# Altium PCB AIRZAI_LID_BD_REVC.PcbDoc (part 1 of 2)
Units mm, origin at the board's own origin, x right, y up, seen from the top; angles counter-clockwise.
Board outline 86.34 x 69.25 mm, 4 copper layers (Top, GND, PWR, Bottom), stack 0.78 mm thick; 60 components, 34 nets, 183 pads, 193 vias.
Unrouted connection lines stored in the file: 106.
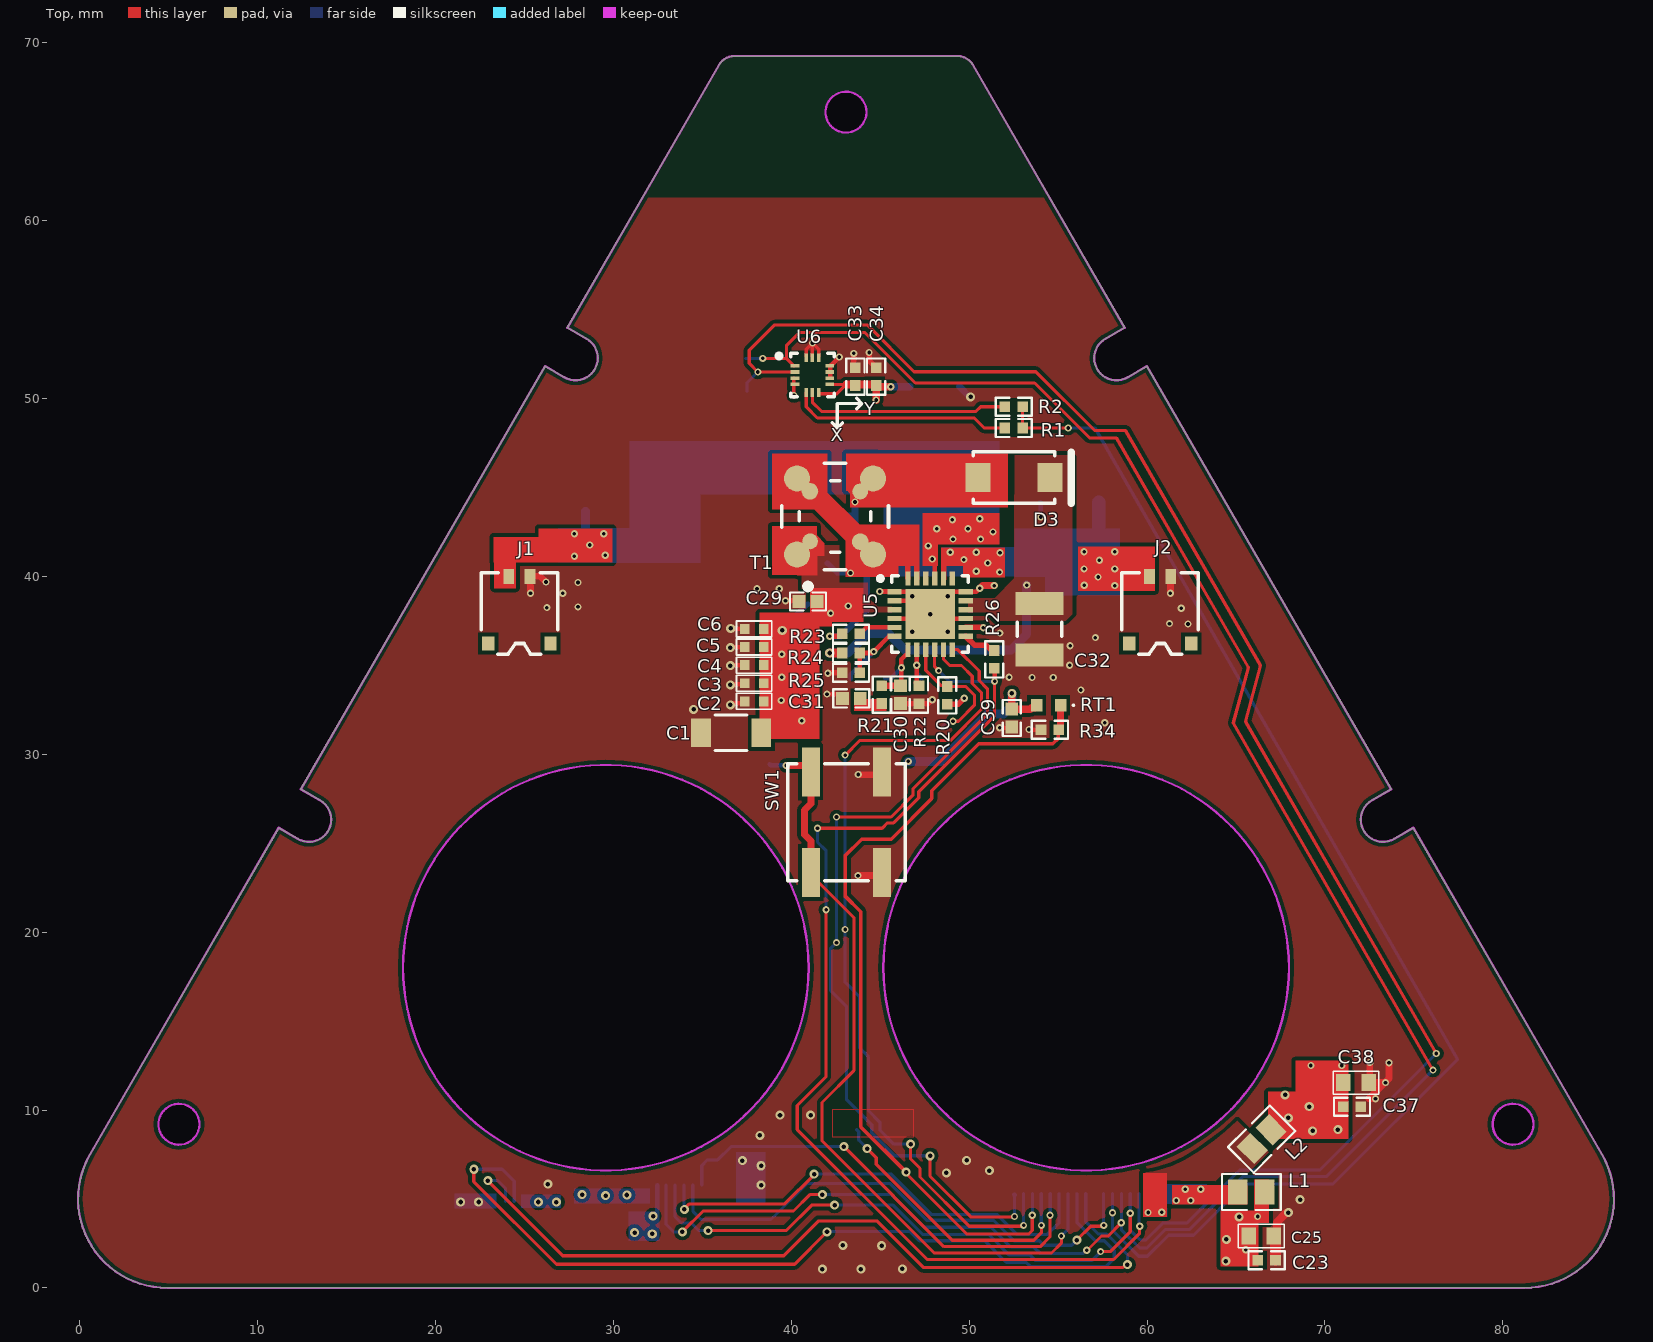
[diagram p0: Top view]
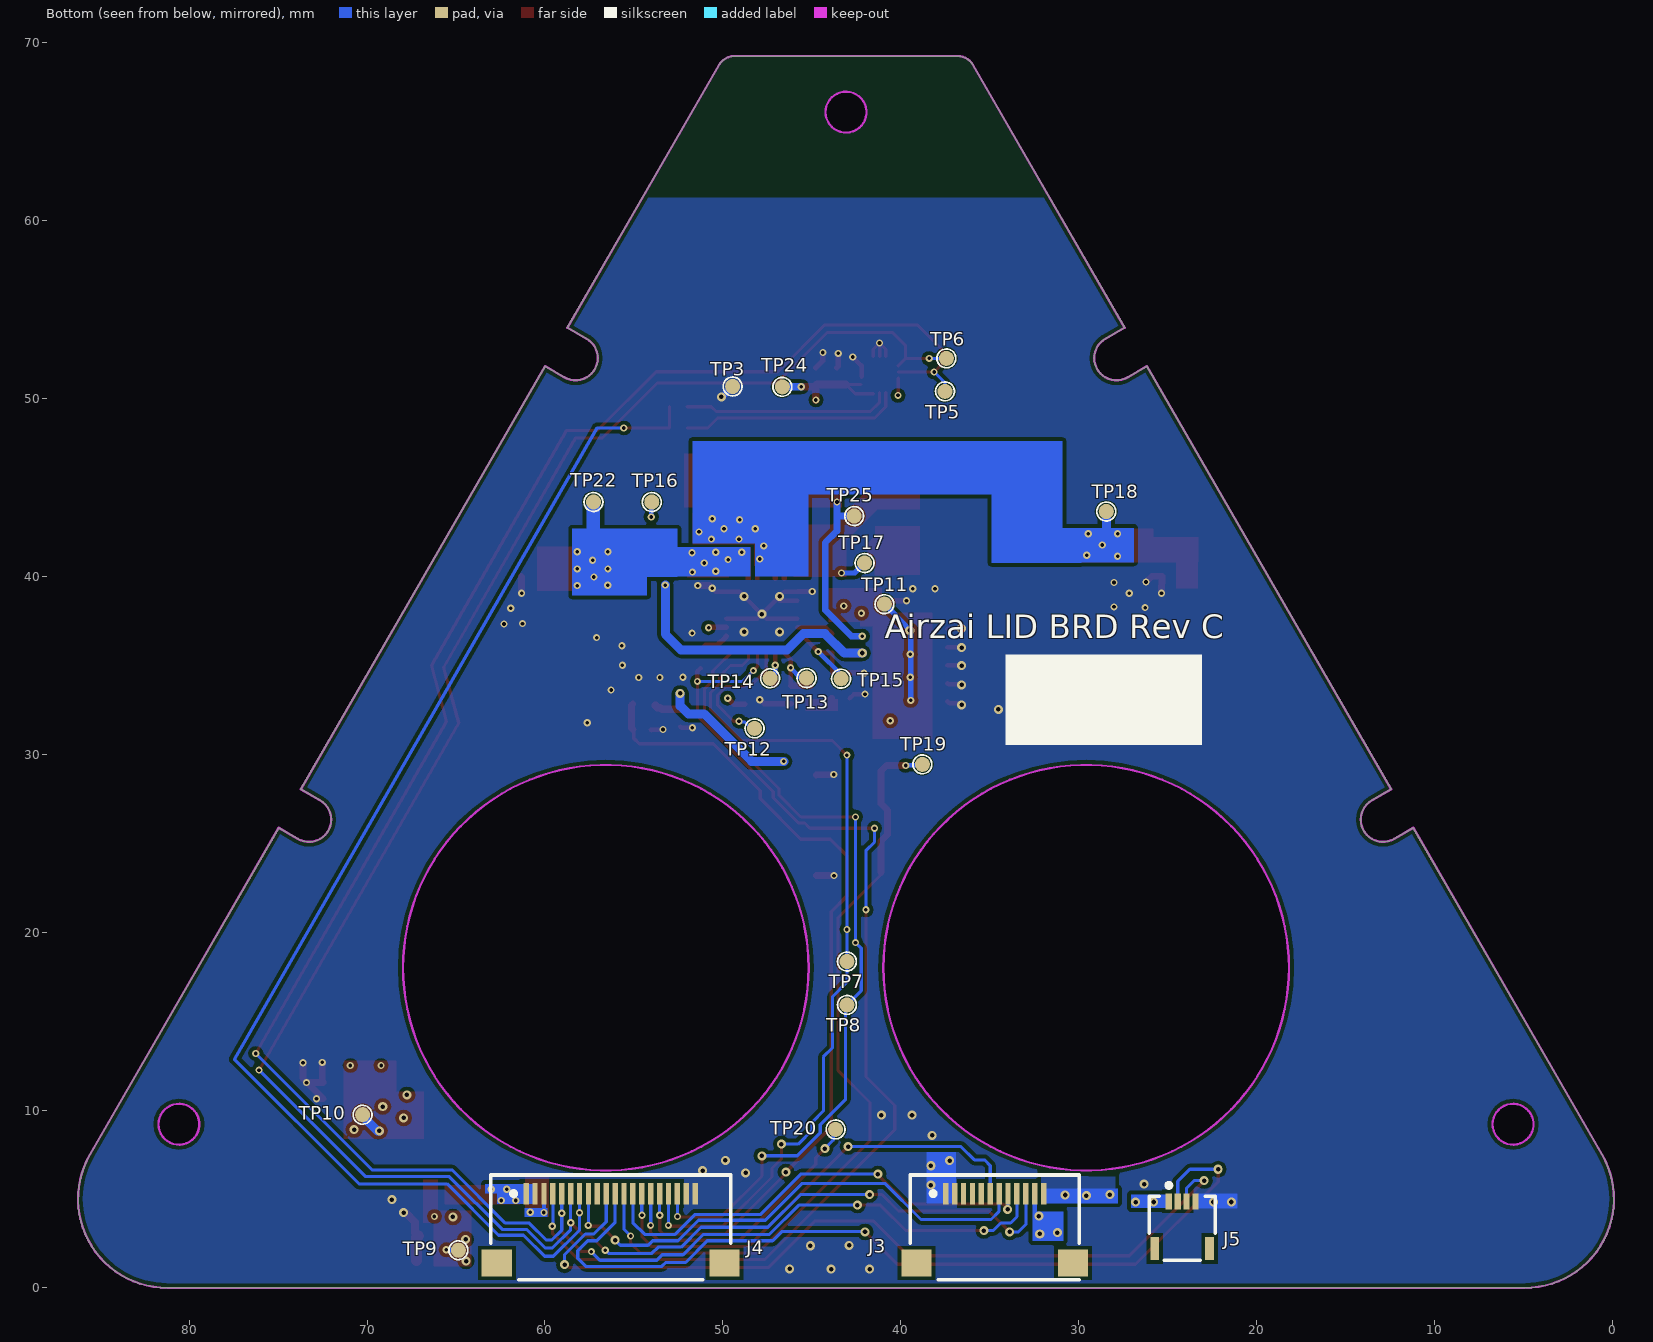
[diagram p1: Bottom view, seen from below]
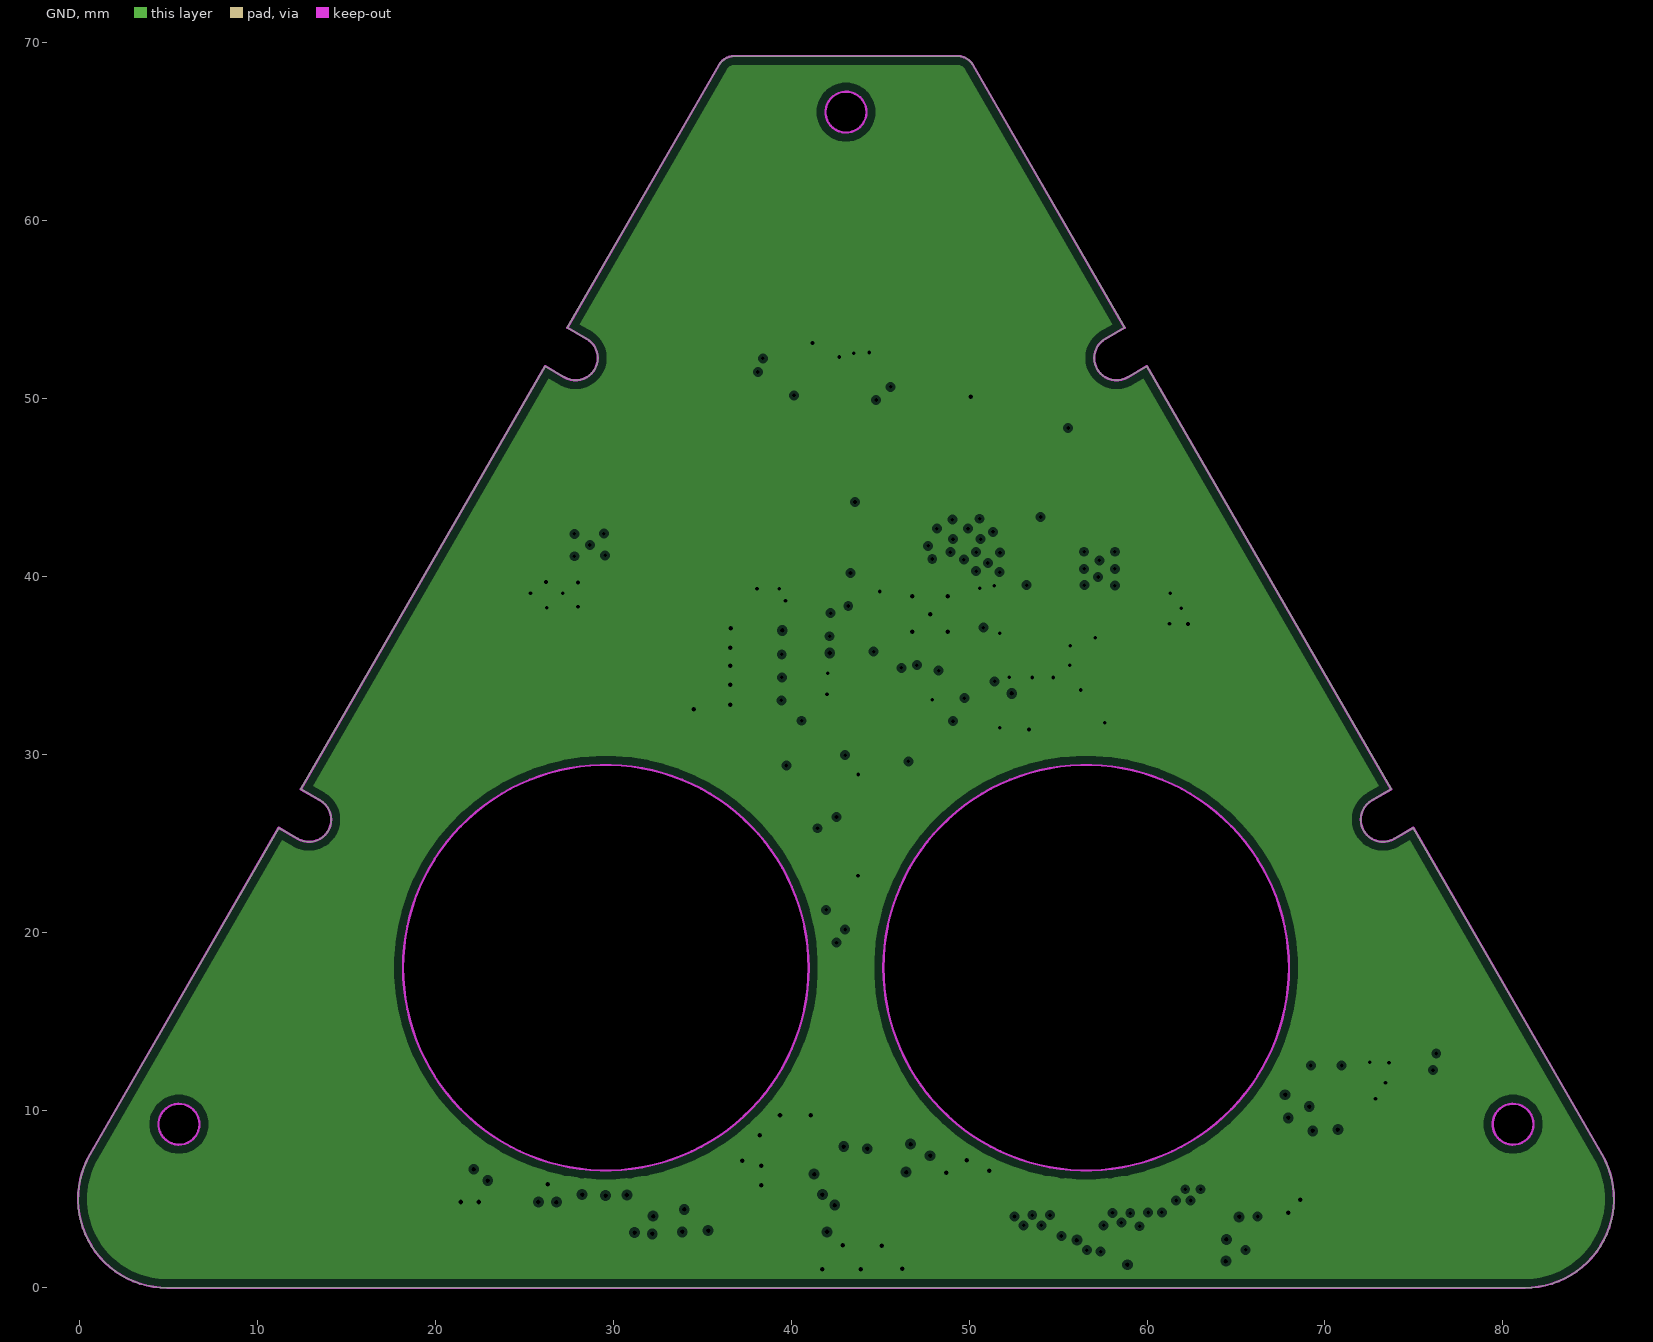
[diagram p2: GND, clearances drawn from the general rule]
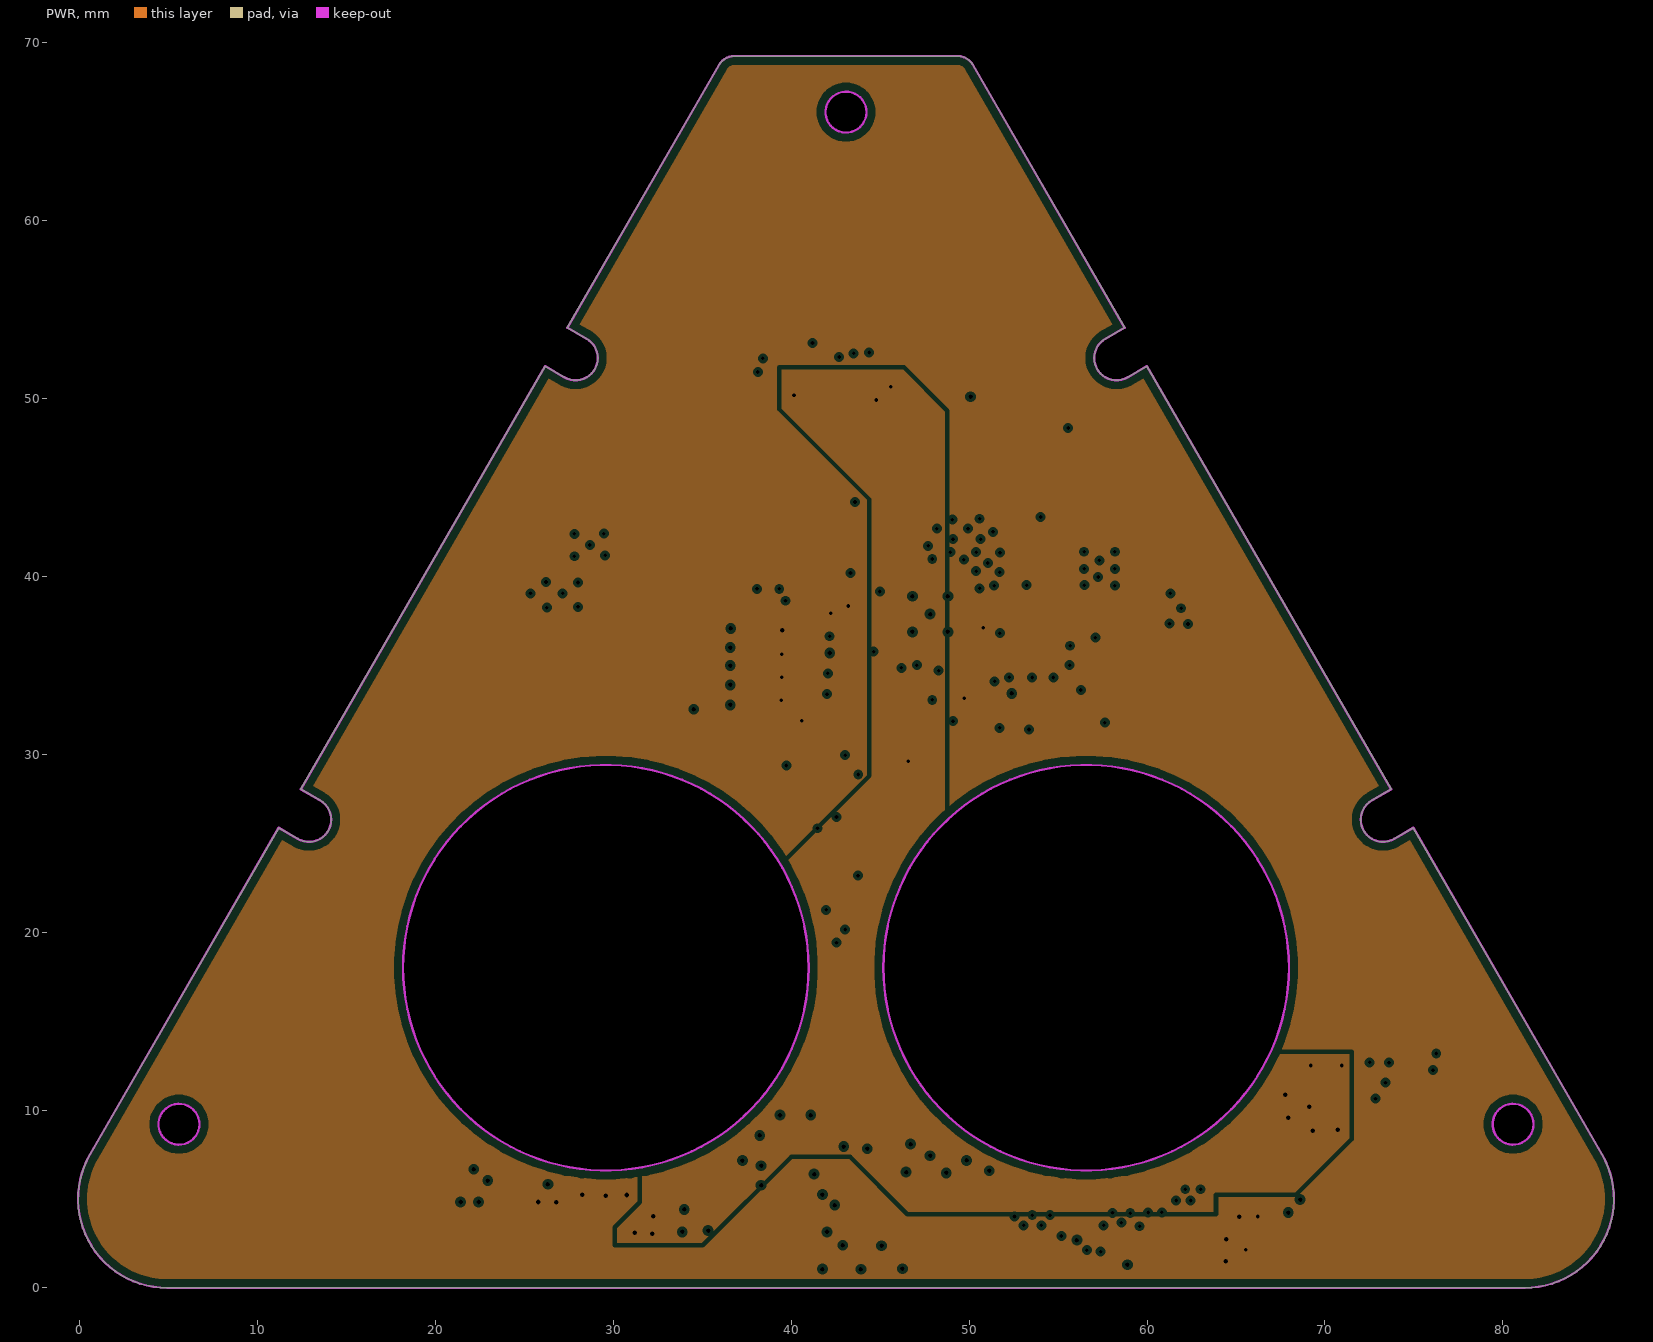
[diagram p3: PWR, clearances drawn from the general rule]
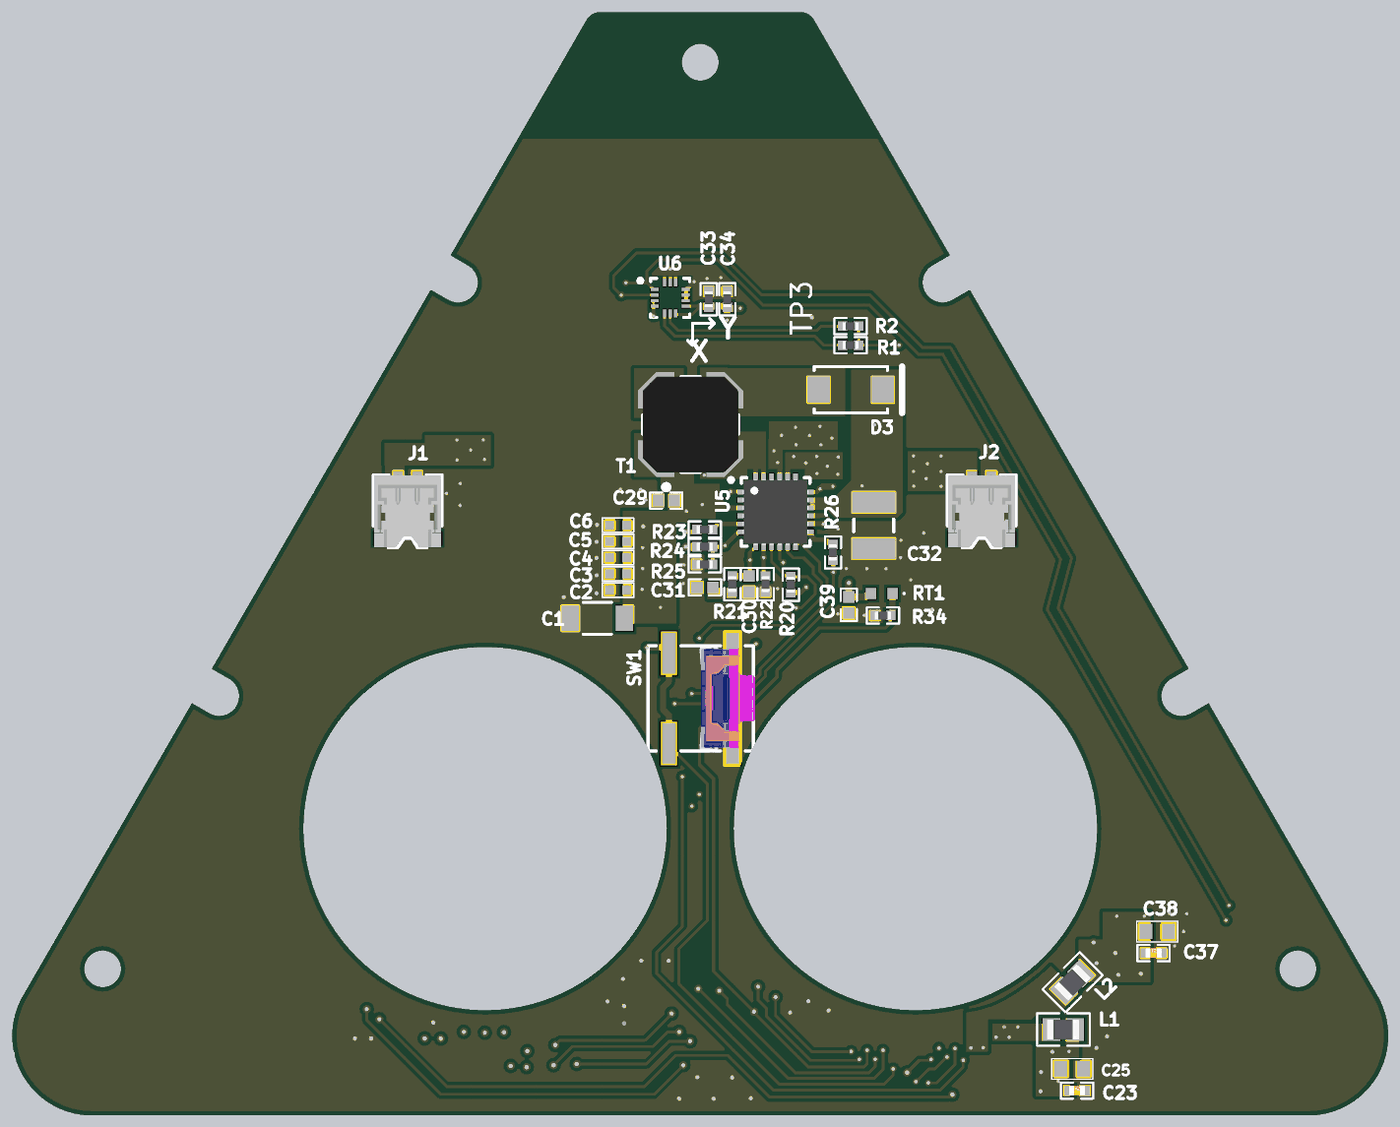
[diagram p5: 3D render of the assembled board from above, using the file's embedded part models]
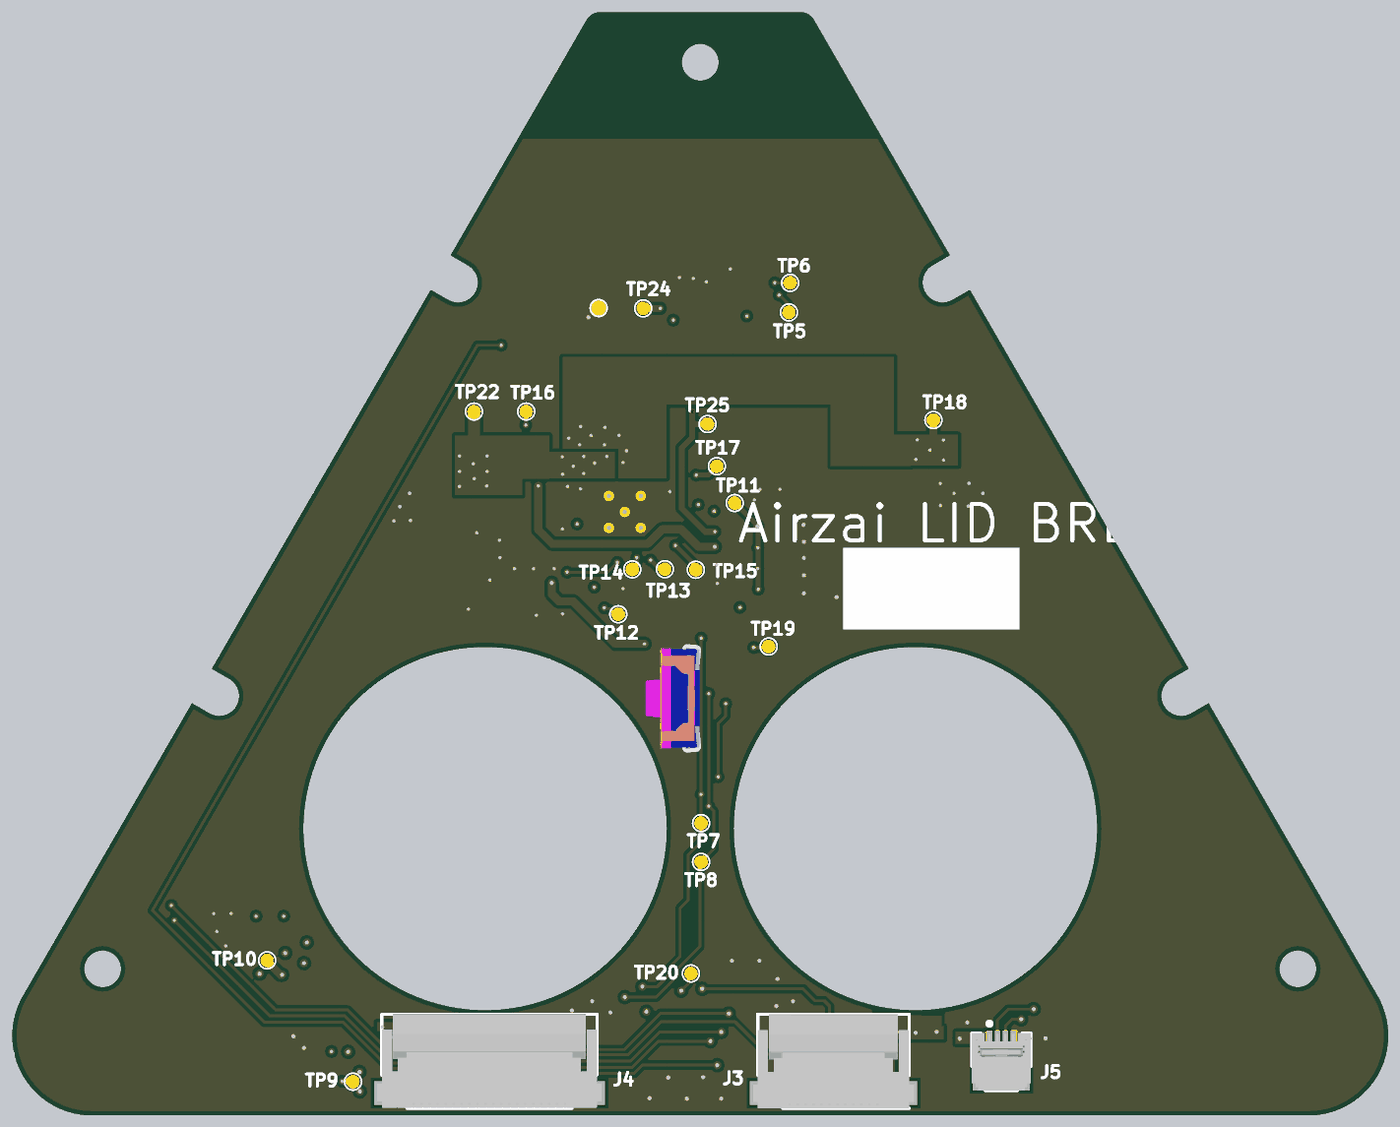
[diagram p6: 3D render of the assembled board from below, using the file's embedded part models]

## Layer stack, top to bottom
Top Solder: solder mask 0.0102, Solder Resist, Dk 3.5
Top: signal copper 0.06
Dielectric1: prepreg 0.132, FR-4, Dk 4.8
GND: plane copper 0.06, net GND
Dielectric 2: core 0.276, Dk 4.2
PWR: plane copper 0.06, net (Multiple Nets)
Dielectric3: prepreg 0.132, FR-4, Dk 4.8
Bottom: signal copper 0.06
Bottom Solder: solder mask 0.0102, Solder Resist, Dk 3.5

## Board outline
4.905,0 cw(c4.905,5) 0.575,7.5 11.179,25.867 12.262,25.242 ccw(c12.887,26.325) 13.512,27.408 12.429,28.033 26.161,51.817 27.244,51.192 ccw(c27.869,52.275) 28.494,53.358 27.411,53.983 35.937,68.75 cw(c36.803,68.25) 36.803,69.25 49.349,69.25 cw(c49.349,68.25) 50.215,68.75 58.741,53.983 57.658,53.358 ccw(c58.283,52.275) 58.908,51.192 59.991,51.817 73.723,28.033 72.64,27.408 ccw(c73.265,26.325) 73.89,25.242 74.973,25.867 85.577,7.5 cw(c81.247,5) 81.247,0
cut-out: 45.176,18 ccw(c56.576,18) 56.576,6.6 ccw(c56.576,18) 67.976,18 ccw(c56.576,18) 56.576,29.4 ccw(c56.576,18)
cut-out: 29.576,6.6 cw(c29.576,18) 18.176,18 cw(c29.576,18) 29.576,29.4 cw(c29.576,18) 40.976,18 cw(c29.576,18)
cut-out: 43.076,64.95 cw(c43.076,66.1) 41.926,66.1 cw(c43.076,66.1) 43.076,67.25 cw(c43.076,66.1) 44.226,66.1 cw(c43.076,66.1)
cut-out: 79.426,9.2 ccw(c80.576,9.2) 80.576,8.05 ccw(c80.576,9.2) 81.726,9.2 ccw(c80.576,9.2) 80.576,10.35 ccw(c80.576,9.2)
cut-out: 5.576,8.05 cw(c5.576,9.2) 4.426,9.2 cw(c5.576,9.2) 5.576,10.35 cw(c5.576,9.2) 6.726,9.2 cw(c5.576,9.2)

## Design rules (kind name [scope] priority, off if disabled: settings)
Clearance Clearance_gnd_polygon [(InNet('GND') AND InPolygon)] p1: gap=0.203 ignorepadtopadclearanceinfootprint=TRUE
Clearance [All] p2: gap=0.152 ignorepadtopadclearanceinfootprint=TRUE
ComponentClearance [All] p1: gap=0.1 collisioncheckmode=3 verticalgap=0.1 showdistances=FALSE
HoleSize HoleSize_1 [All] p1: absolutevalues=TRUE maxlimit=2540 minlimit=0.1 maxpercent=80.000 minpercent=20.000
HoleSize [All] p2: absolutevalues=TRUE maxlimit=2.54 minlimit=0.025 maxpercent=80.000 minpercent=20.000
HoleToHoleClearance mdViaViaSameLayer [All] p1: gap=0.2 allowstackedmicrovias=TRUE
HoleToHoleClearance [All] p2: gap=0.254 allowstackedmicrovias=TRUE
MinimumSolderMaskSliver [All] p1: minsoldermaskwidth=0
PasteMaskExpansion mlMinCreamFrame [All] p1: expansion=0
PasteMaskExpansion [All] p2: expansion=0
PlaneClearance [All] p1: clearance=0.178
PlaneConnect [All] p1: planeconnectstyle=Relief reliefexpansion=0.203 reliefentries=4 reliefconductorwidth=0.254 reliefairgap=0.178
PolygonConnect ThermalVias [IsVia] p1: connectstyle=Direct reliefconductorwidth=0.254 reliefentries=4 polygonreliefangle="90 Angle" airgapwidth=0.254
PolygonConnect [All] p2: connectstyle=Direct reliefconductorwidth=0.254 reliefentries=4 polygonreliefangle="90 Angle" airgapwidth=0.254
RoomDefinition "AIRZAI_LID_BD_REVC Sheet1" [InComponentClass('AIRZAI_LID_BD_REVC Sheet1')] p1: confinementstyle=ConfineIn formatcopy=TRUE lockcomponents=FALSE outline -2.613,-6.673 385.794,-6.673 385.794,80.227 -2.613,80.227
RoutingVias [All] p1: holewidth=0.3 width=0.6 viastyle="Through Hole" minholewidth=0.15 minwidth=0.3 maxholewidth=0.3 maxwidth=0.6
SilkToSilkClearance [All] p1 off: silktosilkclearance=0
SilkToSolderMaskClearance [IsPad] p1 off: minsilkscreentomaskgap=0.254 clearancetoexposedcopper=TRUE
SolderMaskExpansion mlMinStopFrame [All] p1: expansion=0.07
SolderMaskExpansion [All] p2: expansion=0.07
UnRoutedNet [All] p1: checkbadconnections=TRUE
Width [All] p1: maxlimit=25.4 minlimit=0.178 preferedwidth=0.178
20 further rules are at their usual default settings.

## Components (designator, comment, footprint, x,y, rotation, side; value= is the part's Value field where it differs from the comment)
C1 "GRM31CR60J107ME39L" 1206_180 36.623,31.199 r180 top value=100uF
C2 "C1005X5R0J475M050BC" SM0402_BTD.1SM_ACT_H55_CAP_WSS 38.451,32.977 r180 top value=4.7uF
C3 "C1005X5R0J475M050BC" SM0402_BTD.1SM_ACT_H55_CAP_WSS 38.451,33.993 r180 top value=4.7uF
C4 "C1005X5R0J475M050BC" SM0402_BTD.1SM_ACT_H55_CAP_WSS 38.451,35.009 r180 top value=4.7uF
C5 "C1005X5R1A104K050BA" SM0402_BTD.1SM_ACT_H55_CAP_WSS 38.451,36.025 r180 top value=0.1uF
C6 "C1005X5R1A104K050BA" SM0402_BTD.1SM_ACT_H55_CAP_WSS 38.451,37.041 r180 top value=0.1uF
C23 "0.1µF" 0402CAP 66.722,1.557 r0 top
C25 "10µF" SM0603_BTD.1SM_H90_WSS 65.706,2.92 r0 top
C29 "1uF 6.3V" CAPC0402(1005)60_M 40.941,38.59 r0 top value=1uF
C30 "C390pF" CAPC0402(1005)60_M 46.141,33.349 r270 top value=390pF
C31 "C3.9nF" CAPC0402(1005)60_M 43.373,33.141 r0 top value=3.9nF
C32 "2.2uF" C1210_N 53.965,37.027 r90 top value=2.2µF
C33 "0.1µF" 0402 43.601,51.226 r90 top
C34 "2.2µF" 0402 44.77,51.226 r270 top
C37 "0.1µF" 0402CAP 71.522,10.186 r0 top
C38 "10µF" SM0603_BTD.1SM_H90_WSS 71.04,11.539 r0 top
C39 "CAP 100nF 10V 0402(1005)" CAPC0402(1005)60_M 52.396,32.037 r90 top value=100nF
D3 "STPS2H100A" STM-SMA-2_V 52.523,45.55 r0 top value="100V 2A"
J1 "=Value" CON_78171_0002 24.112,40.002 r0 top locked
J2 "=Value" CON_78171_0002 60.137,40.002 r0 top
J3 "XF2M-1215-1A-R100" Omron_XF2M-1215-1A-R100 34.718,3.397 r180 bottom locked
J4 "XF2M-2015-1A-R100" OMRON_XF2M-2015-1A_0 56.305,3.398 r180 bottom
J5 "503480-0400" MOLX-503480-0400 24.177,3.538 r180 bottom
L1 "CB2012T100KR" 0805 65.861,5.392 r0 top value=10uH
L2 "CB2012T100KR" 0805 66.442,8.364 r45 top value=10uH
R1 "DNP" 0402 52.506,48.344 r180 top
R2 "ERJ-2GE0R00X" 0402 52.506,49.538 r180 top value=0
R20 "51K1 1% 0402(1005)" 0402 48.764,33.307 r270 top value="51100.00 Ohm"
R21 "47K 1%" 0402 45.087,33.349 r270 top value="47000.00 Ohm"
R22 "12K 5%" 0402 47.175,33.344 r90 top value="12000.00 Ohm"
R23 "20K5" 0402 43.356,36.773 r180 top value="20500.00 Ohm"
R24 "560K" 0402 43.356,35.692 r180 top value="560000.00 Ohm"
R25 "10K" 0402 43.356,34.58 r0 top value="10000.00 Ohm"
R26 "0R" 0402 51.405,35.335 r270 top
R34 "10K 1% 0402(1005)" 0402 54.538,31.377 r0 top value="10000.00 Ohm"
RT1 "NCP18XH103F03RB" MURA-NCP18XH103F03RB-2_V 54.465,32.757 r180 top value=3455K
SW1 "SKRAALE010" SW_ALPS_SKRAALE010 43.107,26.175 r90 top locked
T1 "NA5880-AE" COILCRAFT_NA5880-AE_MFG 42.464,43.368 r90 top value=3.3uH
TP3 "TESTPOINT" TP_0.9MM 49.45,50.676 r270 bottom
TP5 "TESTPOINT" TP_0.9MM 37.512,50.401 r270 bottom
TP6 "TESTPOINT" TP_0.9MM 37.435,52.255 r270 bottom
TP7 "TESTPOINT" TP_0.9MM 43.023,18.346 r90 bottom
TP8 "TESTPOINT" TP_0.9MM 43.023,15.908 r90 bottom
TP9 "TESTPOINT" TP_0.9MM 64.867,2.116 r90 bottom
TP10 "TESTPOINT" TP_0.9MM 70.252,9.734 r90 bottom
TP11 "TESTPOINT" TP_0.9MM 40.915,38.438 r90 bottom
TP12 "TESTPOINT" TP_0.9MM 48.218,31.453 r90 bottom
TP13 "TESTPOINT" TP_0.9MM 45.293,34.28 r90 bottom
TP14 "TESTPOINT" TP_0.9MM 47.341,34.272 r90 bottom
TP15 "TESTPOINT" TP_0.9MM 43.354,34.247 r90 bottom
TP16 "TESTPOINT" TP_0.9MM 53.996,44.178 r90 bottom
TP17 "TESTPOINT" TP_0.9MM 42.033,40.749 r90 bottom
TP18 "TESTPOINT" TP_0.9MM 28.444,43.645 r90 bottom
TP19 "TESTPOINT" TP_0.9MM 38.782,29.433 r90 bottom
TP20 "TESTPOINT" TP_0.9MM 43.662,8.908 r90 bottom
TP22 "TESTPOINT" TP_0.9MM 57.273,44.178 r90 bottom
TP24 "TESTPOINT" TP_0.9MM 46.656,50.655 r90 bottom
TP25 "TESTPOINT" TP_0.9MM 42.617,43.391 r90 bottom
U5 "FAN8841MPXCT-ND" WFQFN-24-FAN8841MPX 47.807,37.879 r0 top value=FAN8841MPX
U6 "LIS2DHTR" STM-LGA-14_L 41.188,51.316 r0 top

## Footprints (in the part's own frame and the unit in brackets; to place one, negate y for a bottom-side part, rotate by r counter-clockwise, add the part's x,y. Pads: shape width x height; smd on the part's side, far side on the other; paste and mask are expansions set on the pad)
0402 [mm] "Chip Resistor, Body 1.1x0.5mm, IPC High Density"
  rect 0.6x0.6 smd: 1(-0.5,0) 2(0.5,0)
  silkscreen extent -1.02,-0.51 1.02,0.51, body extent -0.5,-0.25 0.5,0.25, height 0.27
0402CAP [mm] "Chip Capacitor, Body 1.1x0.5mm, IPC High Density"
  rect 0.6x0.6 smd: 1(-0.5,0) 2(0.5,0)
  silkscreen extent -1.02,-0.51 1.02,0.51, body extent -0.5,-0.3 0.5,0.3, height 0.19
0805 [mm] "Chip Resistor, Body 2.0x1.3mm, IPC High Density"
  rect 1.1x1.4 smd: 1(-0.75,0) 2(0.75,0)
  silkscreen extent -1.65,-1.02 1.65,1.02, body extent -1.02,-0.64 0.98,0.62, height 0.47
1206_180 [mm]
  rect 1.1x1.6 smd: 1(-1.7,0) 2(1.7,0)
  silkscreen extent -0.9,-1 0.9,1, body extent -1.75,-0.95 1.75,0.95, height 1.8
C1210_N [mm] "Chip Capacitor, Body 3.2x2.5mm, IPC Medium Density"
  rect 1.3x2.7 smd: 1(-1.45,0) 2(1.45,0)
  silkscreen extent -0.4,-1.25 0.4,1.25, body extent -1.7,-1.35 1.7,1.35, height 1.5
CAPC0402(1005)60_M [mm] "Chip Capacitor, Body 1.0x0.5mm, Height 0.6mm, IPC Low Density"
  rect 0.72x0.72 smd: 1(-0.5,0) 2(0.5,0)
  silkscreen extent -1.02,-0.51 1.02,0.51, body extent -0.55,-0.3 0.55,0.3, height 0.6
COILCRAFT_NA5880-AE_MFG [mm]
  round 1.463 smd paste-1000 mask-1000: 1(-2.138,2.138) 2(-2.138,-2.138) 3(2.138,-2.138) 4(2.138,2.138)
  round 0.889 smd paste+0 mask+0: 1(-1.4,1.407) 3(1.4,-1.407)
  round 0.935 smd paste+0 mask+0: 2(-1.414,-1.413) 4(1.414,1.413)
  Top region: -1,3.3 -2.125,3.3 -3.3,2.125 -3.3,1 -2.1,1 -1,2.1
  Top region: 1,3.3 2.125,3.3 3.3,2.125 3.3,1 2.1,1 1,2.1
  Top region: -1,-3.3 -2.125,-3.3 -3.3,-2.125 -3.3,-1 -2.1,-1 -1,-2.1
  Top region: 1,-3.3 2.125,-3.3 3.3,-2.125 3.3,-1 2.1,-1 1,-2.1
  Top region: 0.625,2.2 1.305,2.2 2.2,1.42 2.2,0.625 1.52,0.625 0.625,1.42 0.625,2.2
  Top region: 2.2,-0.625 2.2,-1.305 1.305,-2.2 0.625,-2.2 0.625,-1.42 1.52,-0.625 2.2,-0.625
  Top region: -0.625,-2.2 -1.305,-2.2 -2.2,-1.42 -2.2,-0.625 -1.52,-0.625 -0.625,-1.42 -0.625,-2.2
  Top region: -2.2,0.625 -2.2,1.305 -1.305,2.2 -0.625,2.2 -0.625,1.42 -1.52,0.625 -2.2,0.625
  silkscreen extent -4.06,-3 3,3, body extent -3.4,-3.4 3.4,3.4, height 0.25
CON_78171_0002 [mm] "1.55 MATED HT"
  rect 0.7x0.8 smd mask+0.1: 0(-1.15,-3.775) 0(2.35,-3.775)
  rect 0.6x0.85 smd mask+0.1: 1(0,0) 2(1.2,0)
  silkscreen extent -1.55,-4.37 2.75,0.2, body extent -1.5,-4.33 2.7,0.2, height 1.44
MOLX-503480-0400 [mm] "FPC Connector, 4-Leads, Right Angle, Pitch 0.5 mm, Mated Height 1.0 mm, SMT"
  rect 0.35x0.9 smd: 1(-0.75,1.325) 2(-0.25,1.325) 3(0.25,1.325) 4(0.75,1.325)
  rect 0.5x1.3 smd: MP1(-1.54,-1.325) MP2(1.54,-1.325)
  silkscreen extent -1.85,-1.98 1.85,2.35, body extent -1.85,-1.97 1.85,1.63, height 1.91
MURA-NCP18XH103F03RB-2_V [mm] "Chip, 2-Leads, Body 1.6x0.8mm"
  rect 0.65x0.7 smd: 1(-0.675,0) 2(0.675,0)
  silkscreen extent -1.45,-0.05 -1.35,0.05, body extent -0.8,-0.4 0.8,0.4, height 0.8
Omron_XF2M-1215-1A-R100 [mm]
  rect 0.3x1.2 smd paste+0: 1(-2.75,1.9) 2(-2.25,1.9) 3(-1.75,1.9) 4(-1.25,1.9) 5(-0.75,1.9) 6(-0.25,1.9) 7(0.25,1.9) 8(0.75,1.9) 9(1.25,1.9) 10(1.75,1.9) 11(2.25,1.9) 12(2.75,1.9)
  rect 1.7x1.5 smd paste+0: MP1(-4.4,-2) MP2(4.4,-2)
  silkscreen extent -4.75,-2.95 4.75,2.95, body extent -5.05,-2.95 5.05,2.95, height 2
OMRON_XF2M-2015-1A_0 [mm]
  rect 0.3x1.2 smd paste+0: 1(-4.75,1.9) 2(-4.25,1.9) 3(-3.75,1.9) 4(-3.25,1.9) 5(-2.75,1.9) 6(-2.25,1.9) 7(-1.75,1.9) 8(-1.25,1.9) 9(-0.75,1.9) 10(-0.25,1.9) 11(0.25,1.9) 12(0.75,1.9) 13(1.25,1.9) 14(1.75,1.9) 15(2.25,1.9) 16(2.75,1.9) 17(3.25,1.9) 18(3.75,1.9) 19(4.25,1.9) 20(4.75,1.9)
  rect 1.7x1.5 smd paste+0: MP1(-6.4,-2) MP2(6.4,-2)
  silkscreen extent -6.75,-2.95 6.75,2.95, body extent -7.05,-2.92 7.05,2.98, height 2
SM0402_BTD.1SM_ACT_H55_CAP_WSS [mil]
  rect 22x22 smd mask+4: 1(0,0) 2(42,0)
  silkscreen extent -18,-18 60,18, body extent -1,-10 44,10, height 26
SM0603_BTD.1SM_H90_WSS [mil]
  rect 32x38 smd mask+4: 1(0,0) 2(56,0)
  silkscreen extent -23,-26 79,26, body extent -4,-17 59,17, height 35
STM-LGA-14_L [mm] "LGA, 14-Leads, Body 2.15x2.15mm, Pitch 0.35mm, IPC High Density"
  rect 0.5x0.2 smd mask+0.07: 1(-0.974,0.525) 2(-0.974,0.175) 3(-0.974,-0.175) 4(-0.974,-0.525) 8(0.974,-0.525) 9(0.974,-0.175) 10(0.974,0.175) 11(0.974,0.525)
  rect 0.2x0.5 smd mask+0.07: 5(-0.35,-0.974) 6(0,-0.974) 7(0.35,-0.974) 12(0.35,0.974) 13(0,0.974) 14(-0.35,0.974)
  silkscreen extent -2,-1.22 1.22,1.23, body extent -1.08,-1.07 1.07,1.08, height 1
STM-SMA-2_V [mm] "Diode, 2-Leads, Body 4.6x2.9mm"
  rect 1.4x1.64 smd: 1(-2.015,0) 2(2.015,0)
  silkscreen extent -2.3,-1.45 3.21,1.45, body extent -2.3,-1.45 2.3,1.45, height 2.71
SW_ALPS_SKRAALE010 [mm] "6.2MM SQ 2.9RD ACT"
  rect 2.75x1 smd paste-0.1 mask+0.102: 1(-2.825,2) 1(2.825,2) 2(-2.825,-2) 2(2.825,-2)
  silkscreen extent -3.3,-3.3 3.3,3.3, body extent -3.4,-3.21 3.4,3.22, height 3.48
TP_0.9MM [mm] "0.9MM DIA TESTPOINT"
  round 0.85 smd paste-5 mask+0.05: 1(0,0)
  silkscreen extent -0.53,-0.53 0.53,0.53
WFQFN-24-FAN8841MPX [mm]
  rect 0.8x0.3 smd mask+0.07: 1(-2,1.25) 2(-2,0.75) 3(-2,0.25) 4(-2,-0.25) 5(-2,-0.75) 6(-2,-1.25) 13(2,-1.25) 14(2,-0.75) 15(2,-0.25) 16(2,0.25) 17(2,0.75) 18(2,1.25)
  rect 0.3x0.8 smd mask+0.07: 7(-1.25,-2) 8(-0.75,-2) 9(-0.25,-2) 10(0.25,-2) 11(0.75,-2) 12(1.25,-2) 19(1.25,2) 20(0.75,2) 21(0.25,2) 22(-0.25,2) 23(-0.75,2) 24(-1.25,2)
  rect 2.8x2.8 smd: 25(0,0)
  silkscreen extent -2.92,-2.15 2.15,2.15, body extent -2.05,-2.05 2.05,2.05, height 0.8

## Part data
C1: "CAP, CERM, 100 µF, 6.3 V, +/- 20%, X5R, 1206", Cap_Case=1206, Manufacturer=MuRata, Supplier Part Number 1=490-4539-1-ND, TempCo=X5R, Tolerance_%=20, Value1="0.003 ohm", Value2=6.3V, ValueDisplayed=100µF, AEC Category=Q200, AEC Qualified=?, Cap_F=0.0001, ComponentLink1Description="Datasheet link", ComponentLink1URL=http://search.murata.co.jp/Ceramy/PnsearchViewAction.do?HnOFG=ON&HnNFG=ON&SEL_CNT=50&sLang=en&sKey=GRM31CR60J107ME39L&x=9&y=9&search=startwith, CompType=Capacitor, ESR_ohm=0.003, LatestRevisionDate=2016-07-02, MountType=SMT, PackageReference=1206, PartNumber=GRM31CR60J107ME39L, Polarized=N, Published=2008-06-19, Publisher="Texas Instruments", RoHS=Y, SizeArea_mm2=5.12, SizeAreaWB_mm2=10.92, SizeX_mm=3.2, SizeY_mm=1.6, SizeZ_mm=1.8, Supplier 1=Digi-Key, Supplier 2=Mouser, Supplier 3=Farnell, Supplier Part Number 2=81-GRM31CR60J107ME9L, Supplier Part Number 3=1735535, SymbolVersion=2008-07-09, TaMax_C=85, TaMin_C=-55, Technology=Ceramic, U/M=EA, VDC_V=6.3
C2: "CAP, CERM, 4.7 µF, 6.3 V, +/- 20%, X5R, 0402", Manufacturer=TDK, PartNumber=C1005X5R0J475M050BC
C3 C4: "CAP, CERM, 4.7 µF, 6.3 V, +/- 20%, X5R, 0402", Cap_Case=0402, Manufacturer=TDK, Supplier Part Number 1=445-7395-1-ND, TempCo=X5R, Tolerance_%=20, Value1=Unknown, Value2=6.3V, ValueDisplayed=4.7µF, Cap_F=0.0000047, ComponentLink1Description="Datasheet link", ComponentLink1URL=http://www.tdk.com/pdf/TDKMLCCCapRange.pdf, CompType=Capacitor, LatestRevisionDate=2015-02-23, MountType=SMT, PackageReference=0402, PartNumber=C1005X5R0J475M050BC, Polarized=N, Published=2008-06-19, Publisher="Texas Instruments", RoHS=Y, Supplier 1=Digi-Key, Supplier 2=Farnell, Supplier 3=Newark, Supplier Part Number 2=1962109, Supplier Part Number 3=48T2906, SymbolVersion=2008-07-09, TaMax_C=85, TaMin_C=-55, Technology=Ceramic, U/M=EA, VDC_V=6.3
C5: "CAP, CERM, 0.1 µF, 10 V, +/- 10%, X5R, 0402", Cap_Case=0402, Manufacturer=TDK, Supplier Part Number 1=445-1265-1-ND, TempCo=X5R, Tolerance_%=10, Value1=Unknown, Value2=10V, ValueDisplayed=0.1µF, Cap_F=0.0000001, ComponentLink1Description="Datasheet link", ComponentLink1URL=http://product.tdk.com/en/catalog/datasheets/mlcc_commercial_general_en.pdf, CompType=Capacitor, LatestRevisionDate=2015-02-23, MountType=SMT, PackageReference=0402, PartNumber=C1005X5R1A104K050BA, Polarized=N, Published=2008-06-19, Publisher="Texas Instruments", RoHS=Y, Supplier 1=Digi-Key, Supplier 2=Mouser, Supplier 3=Farnell, Supplier Part Number 2=810-C1005X5R1A104K, Supplier Part Number 3=2368215, SymbolVersion=2008-07-09, TaMax_C=85, TaMin_C=-55, Technology=Ceramic, U/M=EA, VDC_V=10
C6: "CAP, CERM, 0.1 µF, 10 V, +/- 10%, X5R, 0402", Cap_Case=SM0402_BTD.1SM_ACT, Manufacturer=TDK, Supplier Part Number 1=445-1265-1-ND, TempCo=X5R, Tolerance_%=10, Value1=Unknown, Value2=10V, ValueDisplayed=0.1µF, Cap_F=0.0000001, ComponentLink1Description="Datasheet link", ComponentLink1URL=http://product.tdk.com/en/catalog/datasheets/mlcc_commercial_general_en.pdf, CompType=Capacitor, LatestRevisionDate=2015-02-23, MountType=SMT, PackageReference=0402, PartNumber=C1005X5R1A104K050BA, Polarized=N, Published=2008-06-19, Publisher="Texas Instruments", RoHS=Y, Supplier 1=Digi-Key, Supplier 2=Mouser, Supplier 3=Farnell, Supplier Part Number 2=810-C1005X5R1A104K, Supplier Part Number 3=2368215, SymbolVersion=2008-07-09, TaMax_C=85, TaMin_C=-55, Technology=Ceramic, U/M=EA, VDC_V=10
C23 C33 C37: library part C0402-100n, "Capacitor, X7R, ±10%", Case-EIA=0402, Case-Metric=1005, Manufacturer=TDK, Manufacturer Part Number=C1005X7R1C104K, Rated Voltage="16 V", Supplier Part Number 1=445-4952-2-ND, Tolerance=±10%, Note="16V ±10% X7R", Pin Count=2, Supplier 1=Digi-Key, Technology=SMT
  C23: Max Thickness=0.6mm
  C33 C37: Max Thickness="0.6 mm"
C25: library part C0402-100n, "6.3volts X5R 20%", Case-EIA=0603, Case-Metric=1608, Manufacturer=MURATA, Manufacturer Part Number=GRM188R60J106ME47D, Rated Voltage="6.3 V", Supplier Part Number 1=490-3896-6-ND, Tolerance=±10%, Max Thickness="0.9 mm", Note="6.3volts X5R 20%", Supplier 1=Digi-Key, Technology=SMT
C29: library part CAP, "CAP 1uF 6.3V ±10% 0402 (1005 Metric) Thickness 0.6mm SMD", Case-EIA=0402, Case-Metric=1005, Manufacturer=MURATA, Manufacturer Part Number=GRM155R61A105KE15D, Rated Voltage="10 V", Supplier Part Number 1=490-3890-6-ND, Tolerance=±10%, Max Thickness="0.6 mm", Supplier 1=Digi-Key, Technology=SMT
C30: library part CAP, "CAP 390pF 50V ±20% 0402 (1005 Metric) Thickness 0.6mm SMD", Case-EIA=0402, Case-Metric=1005, Manufacturer=KEMET, Manufacturer Part Number=C0402C391K5RACTU, Rated Voltage="50 V", Supplier Part Number 1=399-7792-6-ND, Tolerance=±20%, Max Thickness="0.6 mm", Supplier 1=Digi-Key, Technology=SMT
C31: library part CAP, "CAP 3.9nF 50V ±10% 0402 (1005 Metric) Thickness 0.6mm SMD", Case-EIA=0402, Case-Metric=1005, Manufacturer=TDK, Manufacturer Part Number=C2012C0G1H392J060AA, Rated Voltage="50 V", Supplier Part Number 1=445-7510-1-ND, Tolerance=±10%, Max Thickness="0.6 mm", Supplier 1=Digi-Key, Technology=SMT
C32: library part C3225JB2A225K230, "Imported", Case-EIA=1210, Case-Metric=3225, Manufacturer=TDK, Manufacturer_Part_Number=C3225JB2A225K230AB, Rated Voltage="100 V", Supplier Part Number 1=445-11868-2-ND, Tolerance=±10%, Built_By=EMA_UL_Team, C="Copyright (C) 2015 Accelerated Designs. All rights reserved", Manufacturer Part Number=C3225JB2A225K230AB, RefDes=RefDes, Supplier 1=Digi-Key, Technology=SMT, Type=DEV, Vendor=TDK
C34: library part "C0603-1µ0 X7R", "Capacitor, X7R, ±10%", Case-EIA=0402, Case-Metric=1005, Manufacturer=TDK, Manufacturer Part Number=C1005X5R0J225M, Rated Voltage="6.3 V", Supplier Part Number 1=445-4999-2-ND, Tolerance=±10%, Max Thickness="0.6 mm", Note="6.3V ±20% X5R", Supplier 1=Digi-Key, Technology=SMT
C38: library part C0402-100n, "Capacitor, X7R, ±10%", Case-EIA=0603, Case-Metric=1608, Manufacturer=MURATA, Manufacturer Part Number=GRM188R60J106ME47D, Rated Voltage="6.3 V", Supplier Part Number 1=490-3896-6-ND, Tolerance=±10%, Max Thickness="0.9 mm", Note="6.3volts X5R 20%", Supplier 1=Digi-Key, Technology=SMT
C39: library part CAP, "CAP 100nF 10V ±10% 0402 (1005 Metric) Thickness 0.6mm SMD", Case-EIA=0402, Case-Metric=1005, Manufacturer=Yageo, Manufacturer Part Number=CC0402ZRY5V8BB104, Rated Voltage="25 V", Supplier Part Number 1=311-1375-6-ND, Tolerance=±10%, Max Thickness="0.6 mm", Supplier 1=Digi-Key, Technology=SMT
D3: library part DSKY-AK-2, "Power Schottky Rectifier, 2 A, 100 V, 2-Pin SMD (SMA), RoHS, Tape and Reel", Capacitance @ Vr, F=-, Case-EIA="DO-214AC, SMA", Current - Average Rectified (Io)=2A, Current - Reverse Leakage @ Vr=1µA@100V, Manufacturer=STMicroelectronics, Operating Temperature - Junction=175°C(Max), Package / Case=DO-214AC,SMA, Package Description="2-Pin Surface Mount Device, Body 4.275 x 2.575 mm", Package Reference=SMA, Rated Voltage="100 V", Standard Package=1, Supplier Device Package=SMA(DO-214AC), Supplier Part Number 1=497-3758-6-ND, Voltage - DC Reverse (Vr) (Max)=100V, Voltage - Forward (Vf) (Max) @ If=790mV@2A, Category=DiscreteSemiconductorProducts, Datasheet URL=http://www.st.com/content/ccc/resource/technical/document/datasheet/0a/8b/df/ef/15/72/4f/38/CD00001548.pdf/files/CD00001548.pdf/jcr:content/translations/en.CD00001548.pdf, Datasheet Version=06/2013, Diode Type=Schottky, Family=Diodes,Rectifiers-Single, Manufacturer Part Number=STPS2H100A, Manufacturer URL=http://www.st.com/, Mounting Technology=SurfaceMount, Mounting Type=SurfaceMount, Online Catalog=SchottkyDiode, Other Names=497-3758-6, Other Related Documents=STPS2H100ViewAllSpecifications, Package URL=http://www.st.com/st-web-ui/static/active/en/resource/technical/document/datasheet/CD00283518.pdf, Packaging=Digi-Reel®, Reverse Recovery Time (trr)=-, Series=-, Speed=FastRecovery=200mA(Io), Supplier 1=Digi-Key, Technology=SMT
J1 J2: library part CONN_BM02B_SURS_TF, Manufacturer=MOLEX, Manufacturer Part Number=781710002, Supplier Part Number 1=WM4459TR-ND, Supplier 1=Digi-Key, Technology=SMT
J3: "12 Position FPC Connector Contacts, Top and Bottom 0.020\" (0.50mm) Surface Mount, Right Angle", Current Rating=500mA, Flammability Rating="UL94 V-0", Insulation Resistance=100mR, Manufacturer=Omron, Max Operating Temperature=85°C, Min Operating Temperature=-30°C, Package Quantity=100, Supplier Part Number 1=XF2M-1215-1A-R100-ND, Voltage Rating=50V, Actuator Material=Polymer, ComponentLink1Description="Manufacturer URL", ComponentLink1URL=http://www.molex.com/molex/index.jsp, ComponentLink2Description=Datasheet, ComponentLink2URL=http://www.molex.com/webdocs/datasheets/pdf/en-us/0528921233_FFC_FPC_CONNECTORS.pdf, ComponentLink3Description="Package Specification", ComponentLink3URL=http://www.molex.com/pdm_docs/sd/528921233_sd.pdf, ComponentLink4Description=https://datasheet.ciiva.com/672/en-xf2m-672779.pdf?src-supplier=Digi-Key, ComponentLink4URL=https://datasheet.ciiva.com/672/en-xf2m-672779.pdf?src-supplier=Digi-Key, ComponentLink5Description=https://datasheet.ciiva.com/5139/xf2m-0713-276160-5139000.pdf?src-supplier=Mouser, ComponentLink5URL=https://datasheet.ciiva.com/5139/xf2m-0713-276160-5139000.pdf?src-supplier=Mouser, ComponentLink6Description=https://datasheet.ciiva.com/26317/xf2m-26317532.pdf?src-supplier=Distrelec, ComponentLink6URL=https://datasheet.ciiva.com/26317/xf2m-26317532.pdf?src-supplier=Distrelec, Contact Location=Dual, Contact Material="Copper Alloy", Contact Plating=Gold, Gender=Receptacle, Housing Material="Liquid Crystal Polymer", Length=11mm, Manufacturer Part Number=XF2M-1215-1A-R100, Mount="Surface Mount", Number of Contacts=12, Number of Positions=12, Number of Rows=1, Orientation="Right Angle", Packaging=Bulk, Pitch=0.5mm, Pricing 1="100=1.90710, 300=1.66870, 500=1.62104, 1000=1.38265, 2500=1.37735 (USD)", REACH SVHC=Unknown, RoHS=Yes, Stock 1=100, Supplier 1=Digi-Key, Termination=SMD/SMT
J4: Manufacturer="OMRON ELECTRONIC COMPONENTS", Supplier Part Number 1=Z5253-ND, ComponentLink1Description="Manufacturer URL", ComponentLink1URL=http://www.molex.com/molex/index.jsp, ComponentLink2URL=http://www.molex.com/webdocs/datasheets/pdf/en-us/0528922033_FFC_FPC_CONNECTORS.pdf, ComponentLink3Description="Package Specification", ComponentLink3URL=http://www.molex.com/pdm_docs/sd/528922033_sd.pdf, Manufacturer Part Number=XF2M-2015-1A-R100, Stock 1=0, Supplier 1=Digikey
J5: "0.5 mm Pitch Easy-On(TM) BackFlip(TM) Type FPC Connector, 1.0 mm Mated Height, Right Angle, SMT, Dual Contact, 4 Circuits, -40 to 85 degC, ELV and RoHS Compliant, Tape and Reel", Current (Max per Contact)=0.5A, Manufacturer=Molex, Voltage (Max)="50V AC (RMS)/DC", Circuits (Loaded)=4, ComponentLink1Description="Manufacturer URL", ComponentLink1URL=http://www.molex.com/molex/index.jsp, ComponentLink2Description=Datasheet, ComponentLink2URL=http://www.molex.com/webdocs/datasheets/pdf/en-us/5034800400_FFC_FPC_CONNECTORS.pdf, ComponentLink3Description="Package Specification", ComponentLink3URL=http://www.molex.com/pdm_docs/sd/5034800400_sd.pdf, Contact Position=Dual, Durability (mating cycles max)=10, Entry Angle="90degrees Angle", Mated Height=1.00mm, Material - Metal="Phosphor Bronze", Material - Plating Mating=Gold, Material - Plating Termination="Gold, Tin", Mounting Technology="Surface Mount", Number of Rows=1, Orientation="Right Angle", PackageDescription="4-Lead FPC Connector, Pitch 0.5 mm", PackageReference=503480-0400, PackageVersion="Rev. F, 09/2012", Packing="Tape and Reel", PartNumber=503480-0400, PCB Locator=No, PCB Retention=Yes, Pitch - Mating Interface=0.50mm, Polarized to PCB=Yes, RoHS=TRUE, Stackable=No
L1 L2: "Inductor, 10 µH, 0.5A, 0.65 ohm, SMD", Case/Package=0805, Case Code (Metric)=2012, Current Rating=520mA, DC Resistance (DCR)=500mR, Inductance=10uH, Inductance Tolerance=10%, Manufacturer="Taiyo Yuden", Max DC Current=200mA, Max Operating Temperature=105°C, Min Operating Temperature=-40°C, Package Quantity=3000, Self Resonant Frequency=32MHz, Supplier Part Number 1=587-2452-1-ND, Test Frequency=2.52MHz, Value1="0.65 ohm", Value2=0.5A, ValueDisplayed=10µH, Case Code (Imperial)=0805, ComponentLink1Description="Datasheet link", ComponentLink1URL=http://www.yuden.co.jp/ut/product/category/inductor/BRC2012T2R2MD.pdf, ComponentLink2Description=https://datasheet.ciiva.com/1040/cb2012t100kr-ss-1040384.pdf?src-supplier=Digi-Key, ComponentLink2URL=https://datasheet.ciiva.com/1040/cb2012t100kr-ss-1040384.pdf?src-supplier=Digi-Key, Composition=Wirewound, Core Material=Ferrite, Halogen Free="Halogen Free", Height=1.25mm, Height - Seated (Max)=0.057inch, Lead Free="Lead Free", Length=0.079inch, Manufacturer Part Number=CB2012T100KR, Mount="Surface Mount", Number of Pins=2, Packaging="Tape and Reel", PartNumber=CB2012T100KR, Pricing 1="1 = 0.23000, 10 = 0.20700, 100 = 0.14230, 500 = 0.12162, 1000 = 0.09315 (USD)", REACH SVHC=Unknown, RoHS=Yes, Saturation Current=200mA, Shielding=Unshielded, Stock 1=18059, Supplier 1=Digi-Key, Technology=Wirewound, Termination=SMD/SMT, Tolerance=10%, Width=0.049inch
R1: library part ERJ-2GE0R00X, "RES, DNP, 0402", ComponentLink1Description="Datasheet link", ComponentLink1URL=http://www.panasonic.com/industrial/components/pdf/AOA0000CE1.pdf
R2: "RES, 0, 5%, 0.063 W, 0402", Manufacturer=Panasonic, Power_W=0.063, Supplier Part Number 1=P0.0JCT-ND, TempCo="600 ppm/C", Tolerance_%=5, Value1=5%, Value2=0.063W, Value_Code=0000, ValueDisplayed=0, AEC Category=Q200, AEC Qualified=?, ComponentLink1Description="Datasheet link", ComponentLink1URL=http://www.panasonic.com/industrial/components/pdf/AOA0000CE1.pdf, CompType=Resistor, EIA_Code=E24, LatestRevisionDate=2016-07-01, MountType=SMT, PackageReference=0402, PartNumber=ERJ-2GE0R00X, Published=2008-06-26, Publisher="Texas Instruments", Res_ohm=0, RoHS=Y, SizeArea_mm2=0.5, SizeX_mm=1, SizeY_mm=0.5, SizeZ_mm=0.6, Supplier 1=Digi-Key, Supplier 2=Mouser, Supplier 3=Farnell, Supplier Part Number 2=667-ERJ-2GE0R00X, Supplier Part Number 3=2059190, SymbolVersion=2009-05-29, Technology="Thick Film", U/M=EA, VDC_V=50
R20: library part RES, "51K1 0.063W 1% 0402 (1005 Metric)  SMD", Case-EIA=0402, Case-Metric=1005, Manufacturer="Vishay Dale", Manufacturer Part Number=CRCW040251K1FKED, Power="0.063 W", Supplier Part Number 1=541-51.1KLDKR-ND, Tolerance="1 %", Max Thickness="0.6 mm", Supplier 1=Digi-Key, Technology=SMT
R21: library part RES, "47K 0.063W 1% 0402 (1005 Metric)  SMD", Case-EIA=0402, Case-Metric=1005, Manufacturer=panasonic, Manufacturer Part Number=ERJ-2RKF4702X, Power="0.063 W", Supplier Part Number 1=P47.0KLTR-ND, Tolerance="1 %", Max Thickness="0.6 mm", Supplier 1=Digi-Key, Technology=SMT
R22: library part RES, "12K 0.063W 5% 0402 (1005 Metric)  SMD", Case-EIA=0402, Case-Metric=1005, Manufacturer=Yageo, Manufacturer Part Number=RC0402JR-0712KL, Power="0.063 W", Supplier Part Number 1=311-12KJRTR-ND, Tolerance="5 %", Max Thickness="0.6 mm", Supplier 1=Digi-Key, Technology=SMT
R23: library part RES, "20K5 0.063W 1% 0402 (1005 Metric)  SMD", Case-EIA=0402, Case-Metric=1005, Manufacturer="Vishay Dale", Manufacturer Part Number=CRCW040220K5FKED, Power="0.063 W", Supplier Part Number 1=541-20.5KLDKR-ND, Tolerance="1 %", Max Thickness="0.6 mm", Supplier 1=Digi-Key, Technology=SMT
R24: library part RES, "560K 0.063W 1% 0402 (1005 Metric)  SMD", Case-EIA=0402, Case-Metric=1005, Manufacturer="Vishay Dale", Manufacturer Part Number=CRCW0402560KFKED, Power="0.063 W", Supplier Part Number 1=541-560KLDKR-ND, Tolerance="1 %", Max Thickness="0.6 mm", Supplier 1=Digi-Key, Technology=SMT
R25: library part RES, "10K 0.063W 5% 0402 (1005 Metric)  SMD", Case-EIA=0402, Case-Metric=1005, Manufacturer="Vishay Dale", Manufacturer Part Number=CRCW040210K0JNED, Power="0.063 W", Supplier Part Number 1=541-10KJCT-ND, Tolerance="5 %", Max Thickness="0.6 mm", Supplier 1=Digi-Key, Technology=SMT
R26: library part R0402-12k, "Resistor, ±1%, 0.063W", Case-EIA=0402, Case-Metric=1005, Manufacturer=Panasonic, Manufacturer Part Number=ERJ-2GE0R00X, Supplier Part Number 1=P0.0JTR-ND, Tolerance="5 %", Max Thickness="0.6 mm", Note="0.1W JUMPER", Pin Count=2, Supplier 1=Digi-Key, Technology=SMT
R34: library part RES, "10K 0.063W 1% 0402 (1005 Metric)  SMD", Case-EIA=0402, Case-Metric=1005, Manufacturer=Susumu, Manufacturer Part Number=RR0510P-103-D, Power="0.063 W", Supplier Part Number 1=RR05P10.0KDTR-ND, Tolerance="1 %", Max Thickness="0.6 mm", Supplier 1=Digi-Key, Technology=SMT
RT1: library part MURA-NCP18XH103F03RB-2, "NTC Thermistor, 10 KOhm, +/- 1%, 0.1 W, -40 to 125 degC, 0603 (1608 Metric), RoHS, Tape and Reel", Case-EIA=0603, Case-Metric=1608, Manufacturer=Murata, Rated Current=310A, Resistance=10kO, Supplier Part Number 1=490-4800-2-ND, Temperature Range=-40to+125degC, Tolerance="1 %", Tolerance (%)=±1%, B-constant=3434K, Datasheet URL=http://www.jameco.com/Jameco/Products/ProdDS/1870999.pdf, Datasheet Version=Apr-05, Manufacturer Part Number=NCP18XH103F03RB, Manufacturer URL=http://www.murata.com/, Max Thickness="0.6 mm", Supplier 1=Digi-Key, Technology=SMT, Type=NTC
SW1: library part SW_SKRAALE010, Manufacturer=ALPS, Manufacturer Part Number=SKRAAKE010
T1: library part TRANS-DOT-1-1-4, "Power Inductor and Transformer, 9.6 / 38.42 uH, +/- 20%, 3.4 / 1.7 A, -40 to 85 degC, 4-Pin SMD, RoHS, Tape and Reel", Case-EIA=3.9mmx3.9mm, Inductance - Parallel=3.3uH, Manufacturer=CoilCraft, Maximum DC Current=1.3A, Maximum DC Resistance=19mOhms, Operating Temperature Range=-40Cto+85C, Package Description="4-Pin Surface Mount Device, Body 11.43 x 11.43 mm", Tolerance=20%, Brand=CoilCraft, Core Material=AmorphousMetal, Datasheet URL=https://www.coilcraft.com/pdfs/na5880.pdf, Datasheet Version=03/2007, Height=6.35mm, Inductance - Series=3.3uH, Length=13.97mm, Manufacturer Part Number=NA5880-AE, Manufacturer URL=www.coilcraft.com, Max Thickness=1.1mm, Mounting Style=SMD/SMT, Mounting Technology=SurfaceMount, Packaging=Reel, Product=PowerInductors, Product Category=CoupledInductors, RoHS=True, Series=CTX4,4P,4A, Supplier 1=CoilCraft, Supplier Part Number 1=NA5880-AE, Termination Style=SMD/SMT, Tradename=OCTA-PAC, Type=InductorsandTransformers, Unit Weight=0.112000oz, Width=13.97mm
U5: "IC PIEZO ACTUATOR DVR 24MLP", Case-EIA=24-WFQFN, Manufacturer="ON Semiconductor", Manufacturer Part Number=FAN8841MPX, Supplier 1=Digi-Key, Supplier Part Number 1=FAN8841MPXCT-ND, Technology=SMT
U6: library part LIS2DH, Case-EIA=14-VFLGA, Manufacturer=ST, Supplier Part Number 1=497-13795-2-ND, Manufacturer Part Number=LIS2DHTR, Supplier 1=Digi-Key, Technology=SMT

## Via types
v1: diameter 0.406, hole 0.203, Top to Bottom, tented both sides, 127 vias
v2: diameter 0.508, hole 0.254, Top to Bottom, tented both sides, 61 vias
v3: diameter 0.508, hole 0.254, Top to Bottom, 5 vias

## Nets (pads, with @x,y where several pads share a name; then routed paths per layer and width w, separated by ;. In a path a pad name is that pad's centre, name@x,y a point inside that pad or via, vN(x,y) a via of type N, cw(c..) or ccw(c..) an arc to the next point about the centre after c; other vN are vias at no path point)
3V3: C33.1 C34.2 C37.1 C38.1 C39.2 J3.11 L2.2 RT1.2 TP10.1 TP24.1 U6.3 U6.4 U6.7 U6.8 | length 21.6
  Top w0.178: U6.4@40.138,50.791 U6.3@40.138,51.141 ; U6.7@41.538,50.266 42.56,50.266 43.085,50.791 U6.8@42.238,50.791
  Top w0.203: U6.4@40.138,50.791 40.138,50.187 v1(40.153,50.173)
  Top w0.432: 43.085,50.791 44.705,50.791 C34.2@44.77,50.726 ; v1(44.769,49.916) C34.2@44.769,50.725 ; v1(45.589,50.655) 44.84,50.655 C34.2@44.77,50.726 ; v2@52.396,33.457 v2(52.396,33.424) C39.2@52.396,32.537 53.427,32.537 53.513,32.623 53.68,32.623 53.79,32.732 RT1.2@53.79,32.757
  Bottom w0.254: v2@32.184,3.989 32.462,4.267 J3.11@32.462,5.776
  Bottom w0.432: v2@32.14,3.945 32.184,3.989 v2(32.228,4.033) ; v1(45.589,50.655) TP24.1@46.656,50.655
  Bottom w0.508: v1@46.572,29.599 48.383,29.599 51.05,32.266 51.939,32.266 52.396,32.723 v2(52.396,33.424) ; v2(69.312,8.828) 69.421,8.828 70.252,9.66 TP10.1@70.252,9.734
  other v1: 69.211,12.504 70.942,12.504 46.582,29.599
  other v2: 32.184,3.03 31.187,3.106 70.729,8.895 67.941,9.558 69.119,10.193 67.763,10.853
+5: C1.1 C2.1 C3.1 C4.1 C5.1 C6.1 C23.1 C25.1 C29.2 J3.12 J5.1 L1.2 R20.2 T1.1 TP9.1 TP11.1 U5.3 U5.14 | length 8.8
  Top w0.305: R20.2@48.764,32.807 49.382,32.807 v1(49.729,33.154) ; U5.14@49.807,37.129 50.789,37.129 v1(50.801,37.117)
  Bottom w0.305: v1(39.438,33.028) 39.438,36.961 TP11.1@40.915,38.438 ; TP9.1@64.867,2.116 64.88,2.128 65.531,2.128 v1(65.544,2.141)
  other v1: 66.214,4.013 40.585,31.885 39.467,34.323 39.464,35.618 42.211,37.93 43.201,38.336
  other v2: 64.436,1.506 64.461,2.725 65.172,3.99 25.786,4.829 26.799,4.822 29.561,5.189 30.758,5.221 28.241,5.245 39.493,36.965
ACCELERO_INT: J4.7 R1.1 R2.1 | length 72.8
  Top w0.178: R2.1@53.006,49.538 R1.1@53.006,48.344 v1(55.565,48.344) ; v1(58.055,4.218) v1@58.06,4.213
  Bottom w0.178: v1(55.565,48.344) 57.066,48.344 ; 57.066,48.342 77.459,12.854 70.455,5.85 65.502,5.85 62.611,2.958 61.204,2.958 60.02,1.774 59.524,1.774 58.055,3.243 v1(58.055,4.218) J4.7@58.055,5.298
ADC_CH1: J4.16 R34.2 RT1.1 | length 46.9
  Top w0.178: v2(46.452,6.51) 46.452,6.434 49.856,3.03 53.352,3.03 53.547,3.226 v1(53.547,4.089) ; R34.2@55.038,31.377 R34.2@55.047,31.386
  Top w0.203: v2(46.452,6.51) 43.912,9.05 43.912,21.14 43.023,22.029 43.023,24.29 43.963,25.23 45.614,25.23 47.9,27.516 47.9,27.954 50.535,30.589 54.697,30.589 54.999,30.891 54.999,31.337 R34.2@55.038,31.377
  Top w0.381: R34.2@55.047,31.386 55.14,31.478 RT1.1@55.14,32.757 RT1.1@55.058,32.838
  Bottom w0.178: v1@53.555,4.089 J4.16@53.555,5.298
CAP1_TOUCH_OUT: J3.6 J4.14 | length 26
  Top w0.178: v2@42.941,7.958 48.58,2.319 53.996,2.319 54.547,2.87 54.547,3.937 v1@54.555,3.945
  Bottom w0.178: J3.6@34.962,5.776 34.962,6.866 35.293,7.196 35.861,7.196 36.608,7.943 v2(42.951,7.943) ; v1@54.555,4.046 J4.14@54.555,5.298
  other v1: 54.547,4.089
CAP2_TOUCH_OUT: J3.8 J4.13 | length 26.6
  Top w0.178: v2@33.984,4.431 34.274,4.72 39.633,4.72 41.281,6.368 v2(41.281,6.394)
  Bottom w0.178: J3.8@33.962,5.776 33.962,4.436 v2(33.984,4.414) ; v2@41.271,6.408 45.589,6.408 47.862,4.135 51.554,4.135 52.685,3.005 54.394,3.005 55.055,3.666 J4.13@55.055,5.298 J4.13@55.059,5.294
EN: J4.4 R26.2 U5.10 | length 63.1
  Top w0.178: v1(41.474,25.839) 45.106,25.839 45.411,26.144 45.751,26.144 47.164,27.557 47.164,27.897 51.431,32.164 v1(51.431,34.094) ; v1(41.957,21.255) 41.957,11.88 40.331,10.255 40.331,8.898 47.633,1.595 58.124,1.595 59.571,3.043 59.571,3.451 v1(59.584,3.464) ; U5.10@48.057,35.879 48.057,34.928 v1(48.281,34.704)
  Top w0.254: R26.2@51.253,34.835 51.431,34.657 v1(51.431,34.094)
  Bottom w0.178: v1(41.474,25.839) 41.474,25.063 41.957,24.581 v1(41.957,21.255) ; v1(48.281,34.704) 48.891,34.094 v1(51.431,34.094) ; J4.4@59.555,5.298 59.555,3.493 v1(59.584,3.464)
FO: R20.1 TP12.1 U5.9 | length 7.7
  Top w0.178: U5.9@47.557,35.879 47.557,34.72 48.42,33.857 R20.1@48.815,33.857 ; R20.1@48.764,33.807 49.818,33.807 50.292,33.333 50.292,32.752 49.399,31.859 v1(49.094,31.859)
  Bottom w0.178: TP12.1@48.218,31.453 48.4,31.453 48.762,31.815 49.05,31.815 v1(49.094,31.859)
GND: C1.2 C2.2 C3.2 C4.2 C5.2 C6.2 C23.2 C25.2 C29.1 C30.2 C31.1 C32.1 C33.2 C34.1 C37.2 C38.2 C39.1 J1.2 J2.2 J3.1 J3.2 J4.19 J4.20 J5.4 R22.1 R25.1 R34.1 SW1.2 TP3.1 U5.1 U5.2 U5.4 U5.15 U5.18 U5.25 U6.9 U6.10 U6.11 U6.12 U6.13 U6.14 | length 42.6
  Top w0.203: U6.14@40.838,52.366 40.838,52.763 v1@41.188,53.113 ; U6.13@41.188,52.366 v1@41.188,53.113 ; U6.12@41.538,52.366 41.538,52.763 v1@41.188,53.113
  Top w0.254: v2(36.572,32.774) 36.64,32.774 36.724,32.857 37.265,32.857 C2.2@37.385,32.977 ; v2(36.572,33.899) 36.619,33.946 37.337,33.946 C3.2@37.384,33.993 ; v2(36.572,34.985) 36.584,34.997 37.373,34.997 C4.2@37.385,35.009 ; v2(36.572,35.999) 36.584,36.012 37.372,36.012 C5.2@37.385,36.025 ; v2(36.597,37.073) 36.613,37.057 37.368,37.057 C6.2@37.384,37.041 ; v1(42.007,33.383) 42.631,33.383 C31.1@42.873,33.141 ; U6.9@42.19,51.214 42.19,51.841 42.238,51.877 v1(42.693,52.332) ; v1(44.979,39.149) 45.788,39.149 U5.1@45.807,39.129 46.557,39.129 v3(46.807,38.879) v3(47.807,37.879) ; U5.4@45.807,37.629 47.557,37.629 v3(47.807,37.879) ; U5.2@45.807,38.629 U5.25@46.807,38.629 ; U5.15@49.807,37.629 48.057,37.629 v3(47.807,37.879) ; v1(50.593,39.327) 50.395,39.129 U5.18@49.807,39.129 49.057,39.129 v3(48.807,38.879) v3(47.807,37.879) ; v1(51.71,31.486) 52.345,31.486 C39.1@52.396,31.537 ; v1(53.361,31.389) 53.993,31.389 54.022,31.36 R34.1@54.038,31.377
  Top w0.305: v1(39.676,38.629) 40.39,38.629 C29.1@40.542,38.477 ; v1(42.058,34.552) 42.087,34.58 R25.1@42.856,34.58 ; v1(43.506,52.535) 43.506,51.821 C33.2@43.601,51.726 ; v1(44.377,52.586) 44.377,52.131 44.776,51.732 C34.1@44.77,51.726 ; C30.2@46.141,32.849 47.17,32.849 R22.1@47.175,32.844 47.683,32.844 47.9,33.062 v1(47.926,33.062)
  Top w0.381: v1(25.338,39.047) J1.2@25.312,40.002 25.889,40.002 v1(26.209,39.682) ; v1(43.754,23.177) SW1.2@44.743,23.177 ; v1(43.764,28.862) SW1.2@44.743,28.827 ; v1(50.593,39.327) 50.745,39.479 v1(51.405,39.479) ; v1(61.311,39.047) 61.311,39.976 J2.2@61.337,40.002 ; v2@67.941,4.201 v2(67.941,4.235) ; v1(72.518,12.675) 72.518,11.596 C38.2@72.462,11.539 v1(73.407,11.539) ; v1(72.843,10.637) 72.472,10.637 73.605,11.769 v1(73.605,12.659)
  Top w0.457: C25.2@67.128,2.92 67.306,3.098 67.306,3.691 67.816,4.201 v2@67.941,4.201
  Top w0.635: C25.2@67.128,2.92 67.217,2.831 67.217,1.562 C23.2@67.222,1.557
  Bottom w0.381: TP3.1@49.45,50.676 50.029,50.096 v2(50.085,50.096)
  other v1: 57.628,31.775 56.282,33.612 52.244,34.323 53.539,34.314 54.733,34.314 55.647,35.009 55.673,36.101 57.095,36.558 51.729,36.812 62.299,37.32 61.261,37.346 61.921,38.209 26.259,38.246 28.012,38.285 27.148,39.047 38.07,39.301 39.324,39.301 28.012,39.657 41.195,53.119
  other v2: 41.753,1.053 43.912,1.049 46.249,1.074 45.081,2.37 42.896,2.395 21.408,4.829 22.424,4.829 68.601,4.961 38.299,5.773 26.321,5.829 48.713,6.459 51.13,6.586 38.299,6.866 37.254,7.158 49.856,7.17 38.229,8.567 39.366,9.71 41.093,9.71 34.514,32.527
  other v3: 46.807,36.879 48.807,36.879
"LED Str CLK": J4.11 J5.2 | length 48.9
  Top w0.178: v2(22.151,6.67) 22.151,5.975 26.798,1.328 40.186,1.328 v2(42.007,3.15)
  Bottom w0.178: v2(22.151,6.67) 23.741,6.67 24.427,5.985 J5.2@24.427,4.863 ; v2@42.007,3.166 46.685,3.166 47.202,2.649 50.876,2.649 52.096,1.43 53.209,1.43 53.432,1.207 57.71,1.207 58.159,1.656 58.159,2.088 57.598,2.649 57.089,2.649 56.054,3.684 56.054,5.296 J4.11@56.055,5.298
"LED Str DATA": J4.10 J5.3 | length 46.8
  Top w0.178: v2(22.937,6.029) 27.155,1.811 39.583,1.811 41.539,3.767 44.801,3.767 47.418,1.151 58.657,1.151 58.809,1.303 v2(58.898,1.303)
  Bottom w0.178: v2(22.937,6.029) 23.515,6.029 23.927,5.617 J5.3@23.927,4.863 ; J4.10@56.555,5.298 56.555,3.722 57.247,3.03 57.73,3.03 58.898,1.862 v2(58.898,1.303)
NetC30_1: C30.1 R21.1 TP13.1 U5.7 | length 4.2
  Top w0.254: C30.1@46.192,34.002 v1(46.192,34.856) 46.192,35.332 46.557,35.698 U5.7@46.557,35.879
  Top w0.381: R21.1@45.087,33.849 C30.1@46.141,33.849
  Bottom w0.254: TP13.1@45.293,34.28 45.615,34.28 v1(46.192,34.856)
NetC31_2: C31.2 R21.2 | length 1.4
  Top w0.381: C31.2@43.886,33.154 C31.2@43.873,33.141 44.165,32.849 R21.2@45.087,32.849
NetC32_2: C32.2 D3.2 R24.2 TP16.1 U5.16 U5.17 | length 16.6
  Top w0.508: v2(42.162,35.692) 42.835,35.692 42.845,35.681 R24.2@42.856,35.692
  Bottom w0.254: TP16.1@53.996,44.178 54.022,44.153 v1(54.022,43.34)
  Bottom w0.508: v2(42.162,35.692) 43.173,35.692 44.268,36.787 45.473,36.787 46.387,35.872 52.354,35.872 53.234,36.752 v1(53.234,39.511)
NetD3_1: D3.1 R23.2 T1.3 TP25.1 | length 11.5
  Top w0.305: v1(42.16,36.634) 42.717,36.634 R23.2@42.856,36.773
  Bottom w0.381: v1(42.16,36.634) 42.769,36.634 44.243,38.108 44.243,41.892 43.582,42.553 v1(43.582,44.178) 43.582,43.549 43.424,43.391 TP25.1@42.617,43.391